# Altium PCB Harrison_Riley_Project_Board.PcbDoc
Units mm, origin at the board's own origin, x right, y up, seen from the top; angles counter-clockwise.
Board outline 111.38 x 158.75 mm, 2 copper layers (Top Layer, Bottom Layer); 29 components, 27 nets, 104 pads, 0 vias.
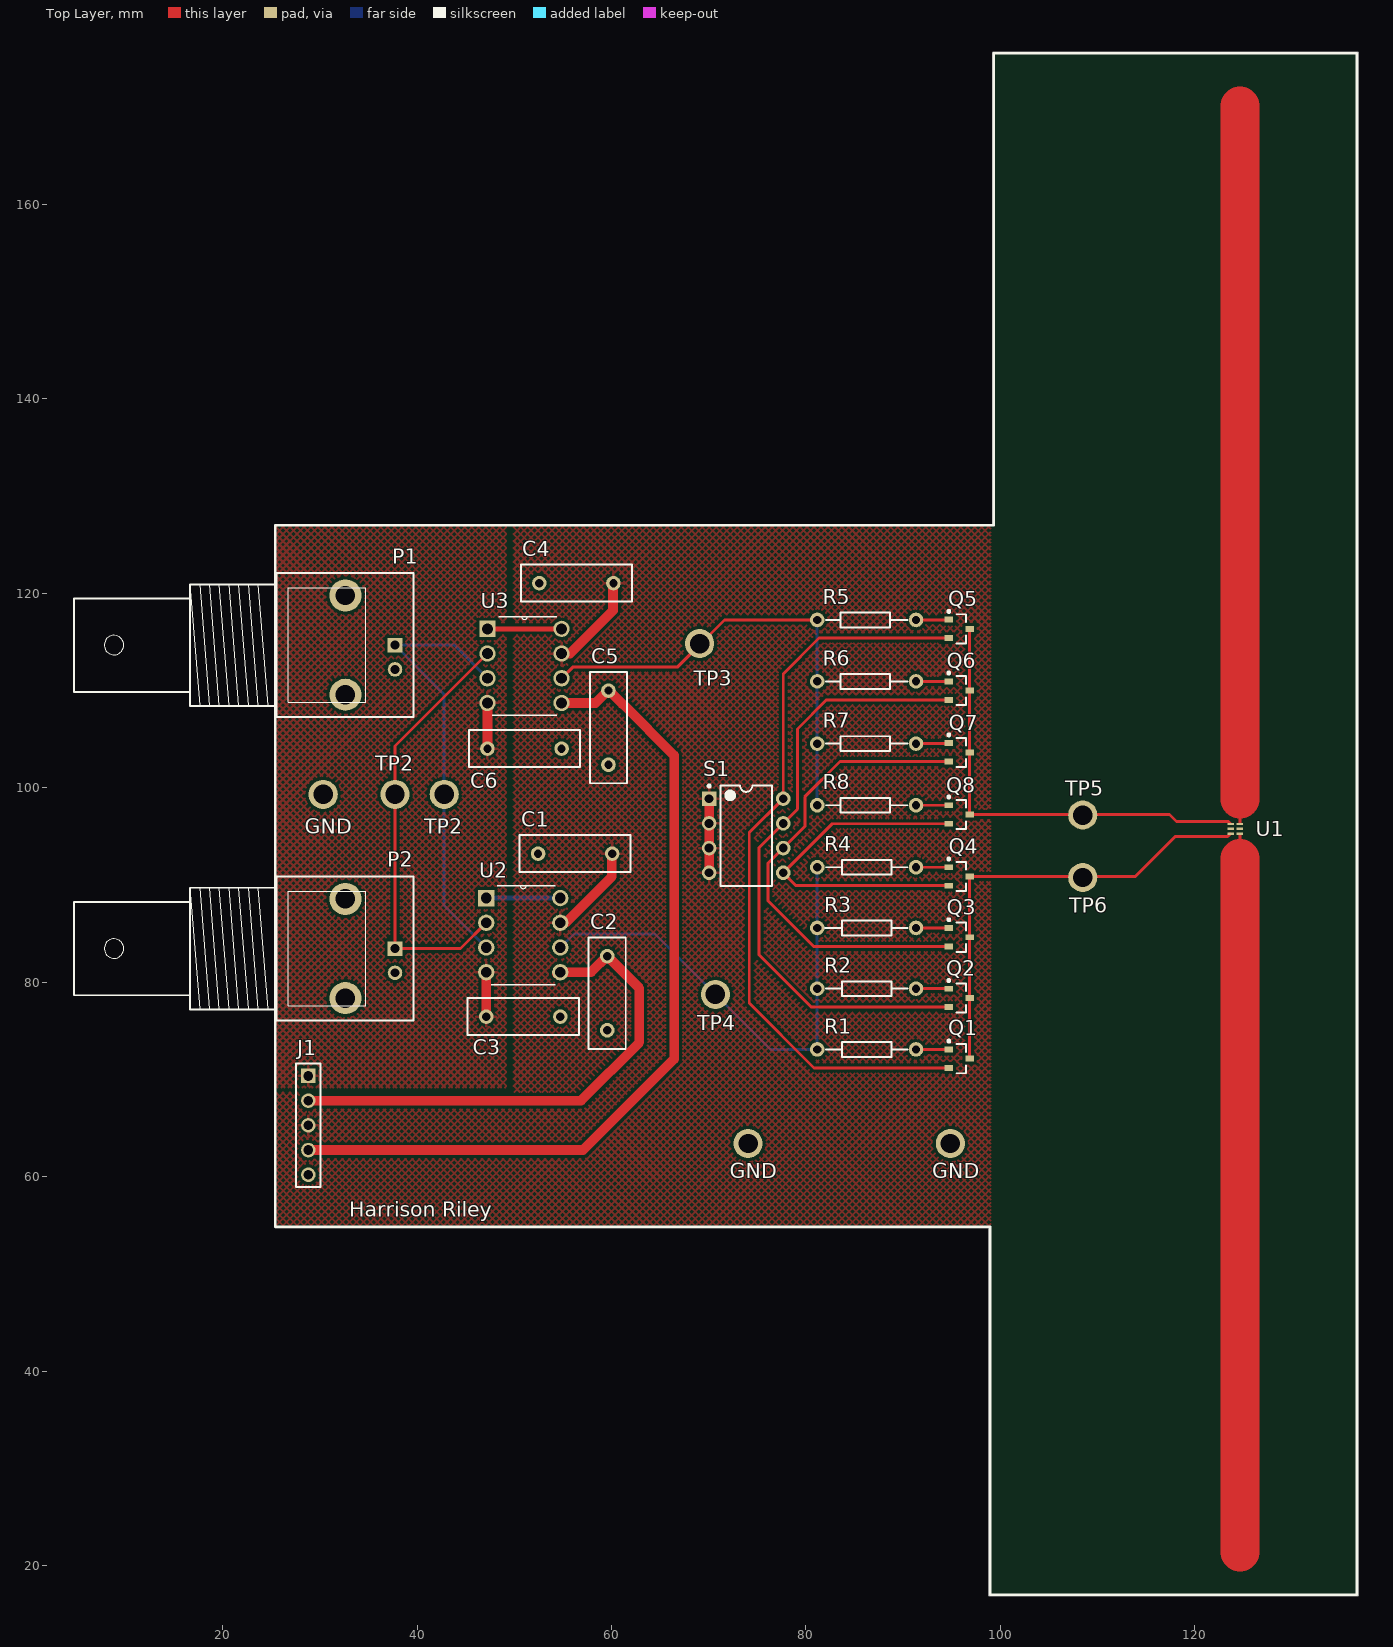
[diagram p0: Top Layer view]
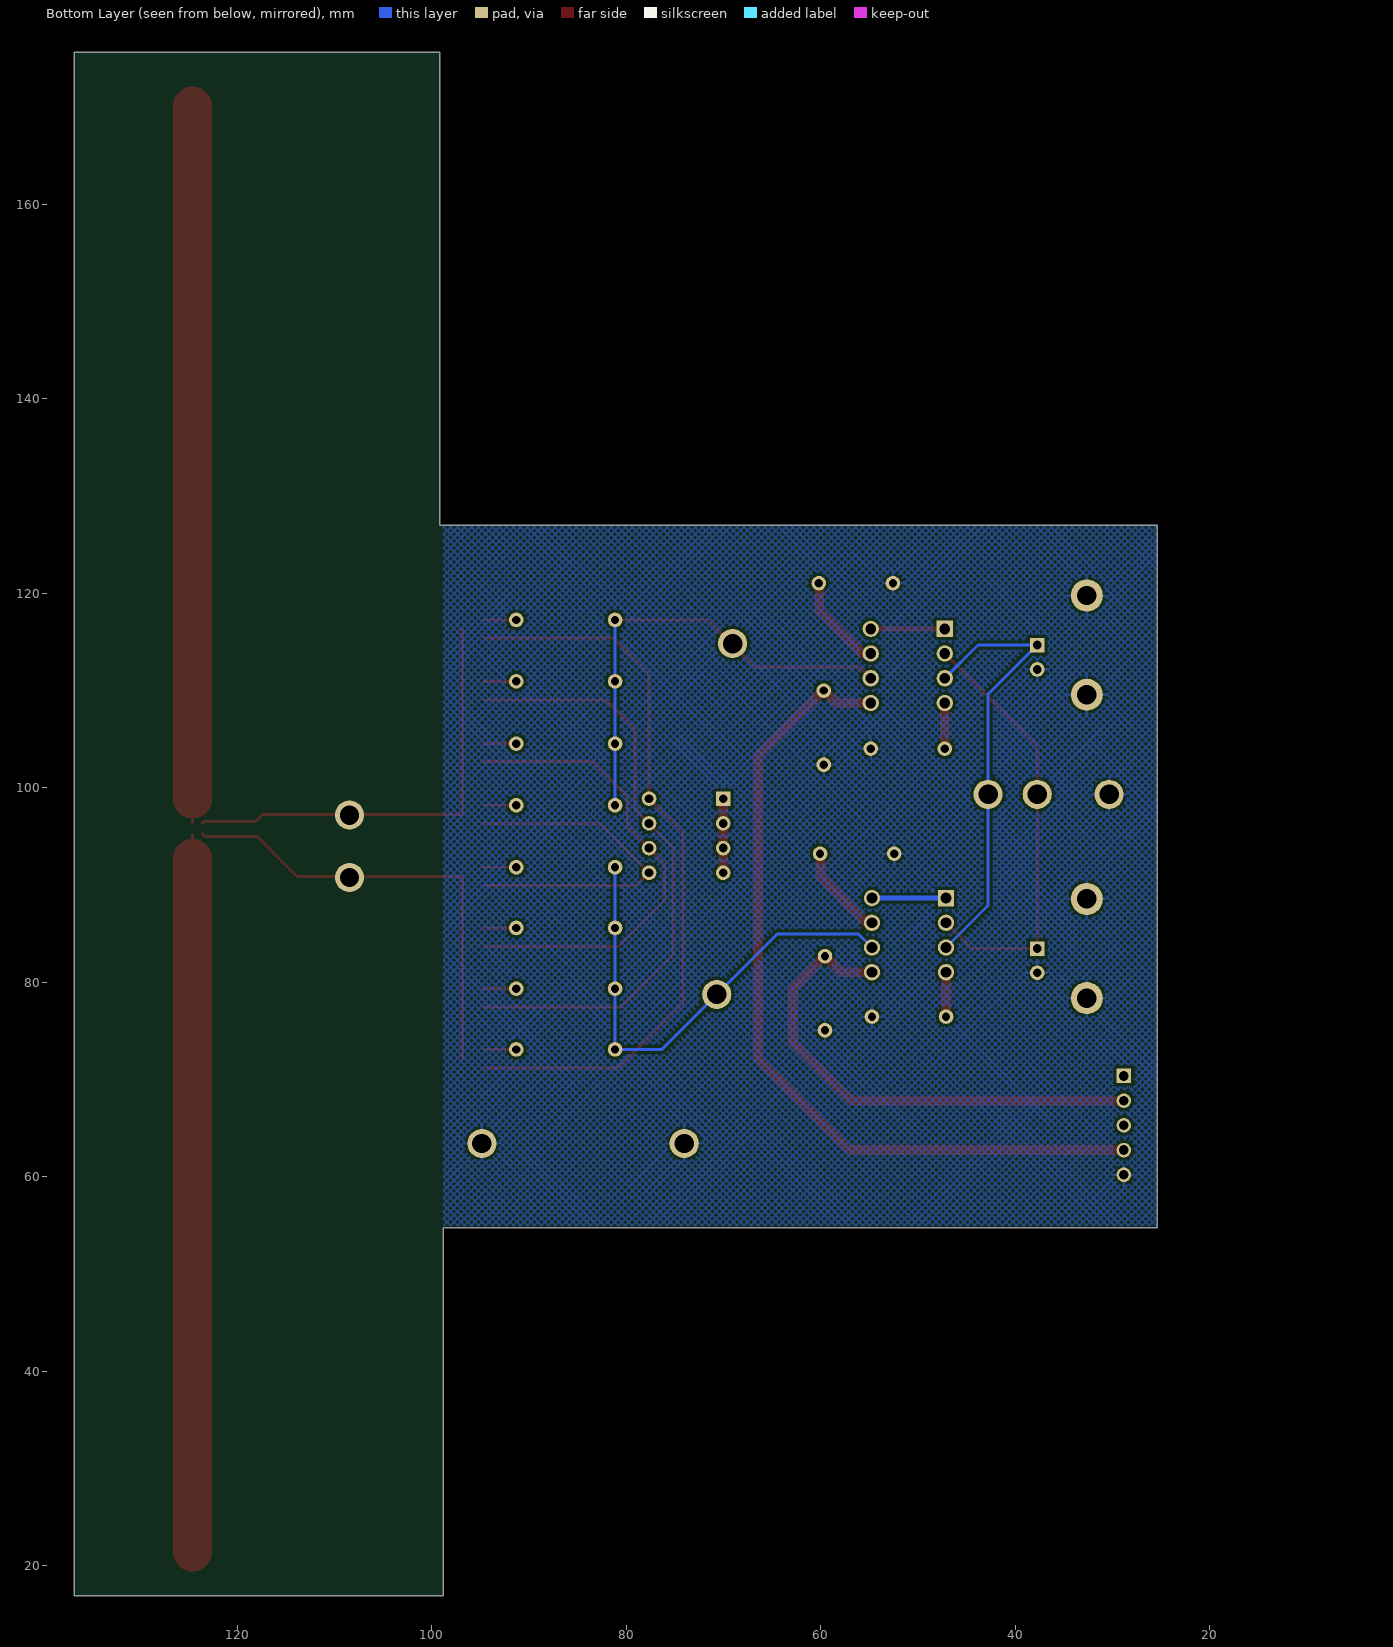
[diagram p1: Bottom Layer view, seen from below]

## Layer stack, top to bottom
Top Solder: solder mask 0.0102, Solder Resist, Dk 3.5
Top Layer: signal copper 0.0356
Dielectric 1: dielectric 0.32, FR-4, Dk 4.8
Bottom Layer: signal copper 0.0356
Bottom Solder: solder mask 0.0102, Solder Resist, Dk 3.5

## Board outline
98.806,54.737 98.806,16.891 136.779,16.891 136.779,127 136.779,175.641 99.187,175.641 99.187,127 25.4,127 25.4,54.737

## Design rules (kind name [scope] priority, off if disabled: settings)
Clearance [All] p1: gap=0.3 ignorepadtopadclearanceinfootprint=FALSE
PolygonConnect [All] p1: connectstyle=Relief reliefconductorwidth=0.254 reliefentries=4 polygonreliefangle="90 Angle" airgapwidth=0.254
RoutingVias [All] p1: holewidth=0.711 width=1.27 viastyle="Through Hole" minholewidth=0.711 minwidth=1.27 maxholewidth=0.711 maxwidth=1.27
SolderMaskExpansion [All] p1: expansion=0.102
UnpouredPolygon [InNet('GND')] p1:
Width Width_U3_Gain [InNet('NetU3_1')] p1: maxlimit=0.5 minlimit=0.5 preferedwidth=0.5
Width Width_U2_Gain [InNet('NetU2_1')] p2: maxlimit=0.5 minlimit=0.5 preferedwidth=0.5
Width Width_PWR_1V [InNet('+1V')] p3: maxlimit=1 minlimit=1 preferedwidth=1
Width Width_REF1 [InNet('REF1_+1.7V')] p4: maxlimit=1 minlimit=1 preferedwidth=1
Width Width_REF2 [InNet('REF2_-1.7V')] p5: maxlimit=1 minlimit=1 preferedwidth=1
Width Width_PWR_+1.35V [InNet('+1.35V')] p6: maxlimit=1 minlimit=1 preferedwidth=1
Width Width_PWR_-1.35V [InNet('-1.35V')] p7: maxlimit=1 minlimit=1 preferedwidth=1
Width [All] p8: maxlimit=4 minlimit=0.3 preferedwidth=0.3
Width Width_RFN [InNet('RFN')] p9: maxlimit=4 minlimit=0.254 preferedwidth=0.254
Width Width_RFP [InNet('RFP')] p10: maxlimit=4 minlimit=0.254 preferedwidth=0.254
29 further rules are at their usual default settings.

## Components (designator, comment, footprint, x,y, rotation, side; value= is the part's Value field where it differs from the comment)
C1 "Cap" RAD-0.3 56.261,93.218 r0 top value=100pF
C2 "Cap" RAD-0.3 59.563,78.867 r90 top value=10uF
C3 "Cap" RAD-0.3 50.927,76.454 r180 top value=100pF
C4 "Cap" RAD-0.3 56.388,121.031 r0 top value=100pF
C5 "Cap" RAD-0.3 59.69,106.172 r90 top value=10uF
C6 "Cap" RAD-0.3 51.054,104.013 r180 top value=100pF
J1 "Header 1" HDR1X5 28.829,70.358 r270 top
P1 "BNC" "BNC_RA CON" 37.739,114.661 r0 top
P2 "BNC" "BNC_RA CON" 37.739,83.459 r0 top
Q1 "QNPN" SOT-23B_L 95.758,72.136 r0 top
Q2 "QNPN" SOT-23B_L 95.758,78.381 r0 top
Q3 "QNPN" SOT-23B_L 95.758,84.626 r0 top
Q4 "QNPN" SOT-23B_L 95.758,90.871 r0 top
Q5 "QNPN" SOT-23B_L 95.758,116.332 r0 top
Q6 "QNPN" SOT-23B_L 95.758,109.982 r0 top
Q7 "QNPN" SOT-23B_L 95.758,103.632 r0 top
Q8 "QNPN" SOT-23B_L 95.758,97.243 r0 top
R1 "Res1" AXIAL-0.3#1 86.233,73.086 r0 top value=1K
R2 "Res1" AXIAL-0.3#1 86.233,79.331 r0 top value=2K
R3 "Res1" AXIAL-0.3#1 86.233,85.576 r0 top value=4K
R4 "Res1" AXIAL-0.3#1 86.233,91.821 r0 top value=8K
R5 "Res1" AXIAL-0.3#2 86.106,117.246 r0 top value=1K
R6 "Res1" AXIAL-0.3#2 86.106,110.932 r0 top value=2K
R7 "Res1" AXIAL-0.3#2 86.106,104.528 r0 top value=4K
R8 "Res1" AXIAL-0.3#2 86.106,98.193 r0 top value=8K
S1 "SW-DIP4" DIP-8 73.849,95.059 r0 top
U1 "G2iL+" *SON50P100X145X50-6N 124.155,95.758 r180 top
U2 "INA118P" *DIP254P762X508-8 54.737,81.026 r0 top
U3 "INA118P" *DIP254P762X508-8 54.864,108.712 r0 top

## Footprints (in the part's own frame and the unit in brackets; to place one, negate y for a bottom-side part, rotate by r counter-clockwise, add the part's x,y. Pads: shape width x height; smd on the part's side, far side on the other; paste and mask are expansions set on the pad)
*DIP254P762X508-8 [mil]
  rect 66x66 hole 44: 1(-300,300)
  round 66 hole 44: 2(-300,200) 3(-300,100) 4(-300,0) 5(0,0) 6(0,100) 7(0,200) 8(0,300)
  silkscreen extent -280,-50 -20,350
*SON50P100X145X50-6N [mil]
  rect 26x10 smd: 1(-18,20) 4(18,-20) 6(18,20)
  rect 26x10 smd paste-39.37: 2(-18,0) 5(18,0)
  rect 26x10 smd paste+0: 3(-18,-20)
AXIAL-0.3#1 [mm] "Axial Device, Thru-Hole; 2 Leads; 0.3 in Pin Spacing"
  round 1.5 hole 0.85: 1(-5.08,0) 2(5.08,0)
  silkscreen extent -2.77,-0.76 2.77,0.76
AXIAL-0.3#2 [mm] "Axial Device, Thru-Hole; 2 Leads; 0.3 in Pin Spacing"
  round 1.5 hole 0.85: 1(-4.953,0) 2(5.207,0)
  silkscreen extent -2.77,-0.76 2.77,0.76
"BNC_RA CON" [mm] "Connector; BNC Elbow"
  rect 1.5x1.5 hole 0.9: 1(0,0)
  round 3.3 hole 2: 2(-5.1,-5.1) 2(-5.1,5.1)
  round 1.5 hole 0.9: 2(0,-2.5)
  silkscreen extent -33,-7.4 1.9,7.4
DIP-8 [mm] "DIP; 8 Leads; Row Spacing 7.62 mm; Pitch 2.54 mm"
  rect 1.5x1.5 hole 0.9: 1(-3.81,3.81)
  round 1.5 hole 0.9: 2(-3.81,1.27) 3(-3.81,-1.27) 4(-3.81,-3.81) 5(3.81,-3.81) 6(3.81,-1.27) 7(3.81,1.27) 8(3.81,3.81)
  silkscreen extent -3.93,-5.15 2.65,5.23, body extent -3.6,-5.15 3.6,5.15, height 5.08
HDR1X5 [mm] "Connector; Header; 5 Position"
  rect 1.5x1.5 hole 1: 1(0,0)
  round 1.5 hole 1: 2(2.54,0) 3(5.08,0) 4(7.62,0) 5(10.16,0)
  silkscreen extent -1.27,-1.27 11.43,1.27
RAD-0.3 [mm] "Radial Cap, Thru-Hole; 2 Leads; 0.3 in Pin Spacing"
  round 1.5 hole 0.85: 1(-3.81,0) 2(3.81,0)
  silkscreen extent -5.71,-1.91 5.71,1.91
SOT-23B_L [mm] "SOT23, 3-Leads, Body 2.9x1.3mm, Pitch 0.95mm, Lead Span 2.4mm, IPC High Density"
  rect 0.85x0.6 smd: 1(-1.075,0.95) 2(-1.075,-0.95) 3(1.075,0)
  silkscreen extent -1.2,-1.5 0.7,1.92, body extent -0.7,-1.5 0.7,1.5, height 1.14

## Part data
C1 C2 C3 C4 C5 C6: "Capacitor", LatestRevisionDate=17-Jul-2002, LatestRevisionNote="Re-released for DXP Platform.", PackageDescription="Radial Cap, Thru-Hole; 2 Leads; 0.3 in Pin Spacing", PackageReference=RAD-0.3, Published=8-Jun-2000, Publisher="Altium Limited"
J1: library part "Header 5", "Header, 5-Pin", LatestRevisionDate=17-Jul-2002, LatestRevisionNote="Re-released for DXP Platform.", Publisher="Altium Limited"
P1 P2: "BNC Elbow Connector", LatestRevisionDate=17-Jul-2002, LatestRevisionNote="Re-released for DXP Platform.", Publisher="Altium Limited"
Q1 Q2 Q3 Q4 Q5 Q6 Q7 Q8: "NPN Bipolar Transistor", LatestRevisionDate=29-May-2009, LatestRevisionNote="IPC-7351 Footprint Added.", PackageDescription="3-Pin SOT-23 Package 0.95 mm Pitch, 2.4 mm Lead Span", PackageReference=SOT-23B, PackageVersion=Aug-1999, Published=8-Jun-2000, Publisher="Altium Limited"
R1 R2 R3 R4 R5 R6 R7 R8: "Resistor", LatestRevisionDate=17-Jul-2002, LatestRevisionNote="Re-released for DXP Platform.", PackageDescription="Axial Device, Thru-Hole; 2 Leads; 0.3 in Pin Spacing", PackageReference=AXIAL-0.3, Published=8-Jun-2000, Publisher="Altium Limited"
S1: "DIP Switch", LatestRevisionDate=17-Jul-2002, LatestRevisionNote="Re-released for DXP Platform.", PackageReference=DIP-8, Published=24-Mar-1999, Publisher="Altium Limited"
U1: library part LD6806F/29H, "Ldo, 2.9v, Sot886", Package=None, Availability=Unavailable, MF=Nexperia, MP=LD6806F/29H, Price=None, SnapEDA_Link=https://www.snapeda.com/parts/LD6806F/29H/Nexperia/view-part/?ref=snap
U2 U3: "SP Amp INSTR Amp Single ±18V 8-Pin PDIP SP Amp INSTR Amp Single ±18V 8-Pin PDIP SP Amp INSTR Amp Single ±18V 8-Pin...", Package="PDIP-8 Burr Brown", Availability=Unavailable, MF="Texas Instruments", MP=INA118P, Price=None, SnapEDA_Link=https://www.snapeda.com/parts/INA118P/Texas%20Instruments/view-part/?ref=snap

## Free pads (board coordinates)
  round 3 hole 2: 4(94.844,63.412) 5(30.353,99.31) 6(74.041,63.412) 13(37.739,99.314) 14(42.799,99.314) 15(69.064,114.82) 16(70.692,78.74) 17(108.458,97.184) 18(108.458,90.765)

## Nets (pads, with @x,y where several pads share a name; then routed paths per layer and width w, separated by ;. In a path a pad name is that pad's centre, name@x,y a point inside that pad or via, vN(x,y) a via of type N, cw(c..) or ccw(c..) an arc to the next point about the centre after c; other vN are vias at no path point)
+1.35V: C1.2 C4.2 J1.3 S1.1 S1.2 S1.3 S1.4 U2.7 U3.7 | length 27.3
  Top Layer w1: U2.7@54.737,85.984 U2.7 55.292,86.106 60.033,90.847 60.033,93.18 C1.2 ; U3.7 55.732,113.792 60.16,118.22 60.16,120.993 C4.2 ; S1.4 S1.3 S1.2 S1.1
-1.35V: C3.2 C6.2 J1.1 U2.4 U3.4 | length 9.4
  Top Layer w1: C3.2 U2.4 ; C6.2 U3.4 U3.4@47.244,108.834
GND: C1.1 C2.1 C3.1 C4.1 C5.1 C6.1 J1.5 P1.2 P2.2 pad.4 pad.5 pad.6
NetP1_1: P1.1 pad.14 U2.3 U3.3 | length 45.9
  Bottom Layer w0.3: U2.3 42.788,87.895 42.788,99.314 42.788,109.612 P1.1 43.835,114.661 U3.3
NetP2_1: P2.1 pad.13 U2.2 U3.2 | length 44.7
  Top Layer w0.3: U2.2 44.47,83.459 P2.1 37.739,104.287 U3.2
NetQ1_1: Q1.1 R1.2 | length 3.3
  Top Layer w0.3: R1.2 Q1.1@94.615,73.086
NetQ1_2: Q1.2 Q5.2 S1.8 | length 77
  Top Layer w0.3: Q1.2@94.615,71.186 80.833,71.186 74.168,77.851 74.168,95.378 S1.8 77.659,111.695 81.346,115.382 Q5.2@94.615,115.382
NetQ1_3: pad.18 Q1.3 Q2.3 Q3.3 Q4.3 U1.6 | length 47.3
  Top Layer w0.3: Q1.3 Q2.3 Q3.3 Q4.3 113.858,90.871 117.983,94.996 123.365,94.996 U1.6@123.587,95.218
NetQ2_1: Q2.1 R2.2 | length 3.4
  Top Layer w0.3: R2.2 Q2.1 Q2.1@94.742,79.331
NetQ2_2: Q2.2 Q6.2 S1.7 | length 63.3
  Top Layer w0.3: Q2.2@94.615,77.431 80.557,77.431 75.184,82.804 75.184,93.854 S1.7 79.121,97.791 79.121,106.045 82.108,109.032 Q6.2@94.615,109.032
NetQ3_1: Q3.1 R3.2 | length 3.3
  Top Layer w0.3: R3.2 Q3.1@94.615,85.576
NetQ3_2: Q3.2 Q7.2 S1.6 | length 49
  Top Layer w0.3: Q3.2@94.615,83.673 80.792,83.673 76.073,88.392 76.073,92.203 S1.6 79.883,96.013 79.883,99.06 83.505,102.682 Q7.2
NetQ4_1: Q4.1 R4.2 | length 3.4
  Top Layer w0.3: R4.2 Q4.1@94.742,91.821
NetQ4_2: Q4.2 Q8.2 S1.5 | length 36.6
  Top Layer w0.3: Q4.2@94.615,89.921 78.987,89.921 S1.5 82.703,96.293 Q8.2@94.615,96.293
NetQ5_1: Q5.1 R5.2 | length 3.4
  Top Layer w0.3: R5.2 91.331,117.264 Q5.1@94.665,117.264
NetQ5_3: pad.17 Q5.3 Q6.3 Q7.3 Q8.3 U1.4 | length 46.3
  Top Layer w0.3: Q8.3@96.774,97.243 Q8.3 ; Q5.3 Q6.3 Q7.3 Q8.3 ; U1.4@123.634,96.329 123.444,96.52 118.11,96.52 117.387,97.243 Q8.3
NetQ6_1: Q6.1 R6.2 | length 3.3
  Top Layer w0.3: R6.2 Q6.1@94.615,110.932
NetQ7_1: Q7.1 R7.2 | length 3.3
  Top Layer w0.3: R7.2@91.313,104.555 Q7.1@94.656,104.555
NetQ8_1: Q8.1 R8.2 | length 3.3
  Top Layer w0.3: R8.2 Q8.1@94.615,98.193
NetR1_1: pad.16 R1.1 R2.1 R3.1 R4.1 U2.6 | length 50.6
  Bottom Layer w0.3: U2.6 56.134,84.963 64.468,84.963 76.345,73.086 R1.1 R2.1 R3.1 R4.1
NetR5_1: pad.15 R5.1 R6.1 R7.1 R8.1 U3.6 | length 47.8
  Top Layer w0.3: U3.6 56.007,112.395 66.764,112.395 71.614,117.246 R5.1
  Bottom Layer w0.3: R8.1 R5.1
NetU2_1: U2.1 U2.8 | length 7.6
  Bottom Layer w0.5: U2.1 U2.8
NetU3_1: U3.1 U3.8 | length 7.6
  Top Layer w0.5: U3.1 U3.8
REF1_+1.7V: C2.2 J1.2 U2.5 | length 52.9
  Top Layer w1: J1.2 56.867,67.818 62.865,73.816 62.865,79.375 C2.2 57.912,81.026 U2.5 54.608,80.897 U2.5@54.371,80.897
  Bottom Layer w1: U2.5@54.608,80.897 U2.5
REF2_-1.7V: C5.2 J1.4 U3.5 | length 87.6
  Top Layer w1: J1.4 57.078,62.738 66.442,72.103 66.442,103.312 61.169,108.585 61.141,108.585 59.744,109.982 C5.2 59.636,109.982 58.366,108.712 U3.5
RFN: U1.3 | length 72.8
  Top Layer w0.3: 124.612,96.393 124.612,97.917
  Top Layer w4: 124.612,98.806 124.612,170.106
RFP: U1.1 | length 73
  Top Layer w0.3: 124.612,93.472 U1.1@124.612,95.123
  Top Layer w4: 124.612,21.41 124.612,92.71
pads on no net: U1.2 U1.5

## Polygon pours and split planes (outlines as drawn)
-1.35V on Top Layer "Top Layer--1.35V" (hatched 45Degree grid 0.508 track 0.203, pour order 20): 25.4,127 25.4,69.169 49.149,69.169 49.149,127
+1.35V on Top Layer "Top Layer-+1.35V" (hatched 45Degree grid 0.508 track 0.203, pour order 22): 25.418,68.707 25.418,54.991 98.951,54.991 98.951,127 49.929,127 49.929,68.707
no net on Top Layer "Top Layer-No Net" (solid, pour order 4): 74.422,76.2
no net on Top Layer "Top Layer-No Net 1" (solid, pour order 0): 35.433,118.11
GND on Bottom Layer "Bottom Layer-GND" (hatched 45Degree grid 0.508 track 0.203, pour order 18): 25.4,127 25.4,54.991 98.806,54.991 98.806,127

## Silkscreen, mask and mechanical layers (free items; w line width, h text height)
Top Overlay:
  lines w0.2: 81.937,85.576 83.464,85.576 ; 82.042,73.086 83.464,73.086 ; 82.042,79.331 83.464,79.331 ; 82.042,91.821 83.464,91.821 ; 82.042,98.193 83.337,98.193 ; 82.042,110.932 83.337,110.932 ; 82.049,104.528 83.337,104.528 ; 82.073,117.246 83.337,117.246 ; 88.875,98.193 90.424,98.193 ; 88.875,104.528 90.424,104.528 ; 88.875,110.932 90.424,110.932 ; 88.875,117.246 90.424,117.246 ; 89.002,73.086 90.424,73.086 ; 89.002,79.331 90.424,79.331 ; 89.002,85.576 90.424,85.576 ; 89.002,91.821 90.424,91.821
  lines w0.254: 25.4,54.864 98.933,54.864 98.933,17.018 136.652,17.018 136.652,175.514 99.314,175.514 99.314,127 99.187,127 25.4,127 25.4,54.864
  text "TP3" at 68.453,110.49 h1.52
  text "TP2" at 35.687,101.727 h1.52
  text "TP5" at 106.68,99.187 h1.52
  text "GND" at 28.448,95.25 h1.52
  text "TP2" at 40.767,95.25 h1.52
  text "TP6" at 107.061,87.122 h1.52
  text "TP4" at 68.834,75.057 h1.52
  text "GND" at 72.136,59.817 h1.52
  text "GND" at 92.964,59.817 h1.52
  text "Harrison Riley" at 33.02,55.88 h1.52